# Altium PCB AnalogIO-CAN-HW-Rev1.PcbDoc (part 2 of 2)
Units mil, origin at the board's own origin, x right, y up, seen from the top; angles counter-clockwise.
Board outline 6000 x 4000 mil, 4 copper layers (Top Layer, Power Layer, Ground Layer, Bottom Layer), stack 22.156 mil thick; 185 components, 126 nets, 530 pads, 4 vias.
Unrouted connection lines stored in the file: 357.
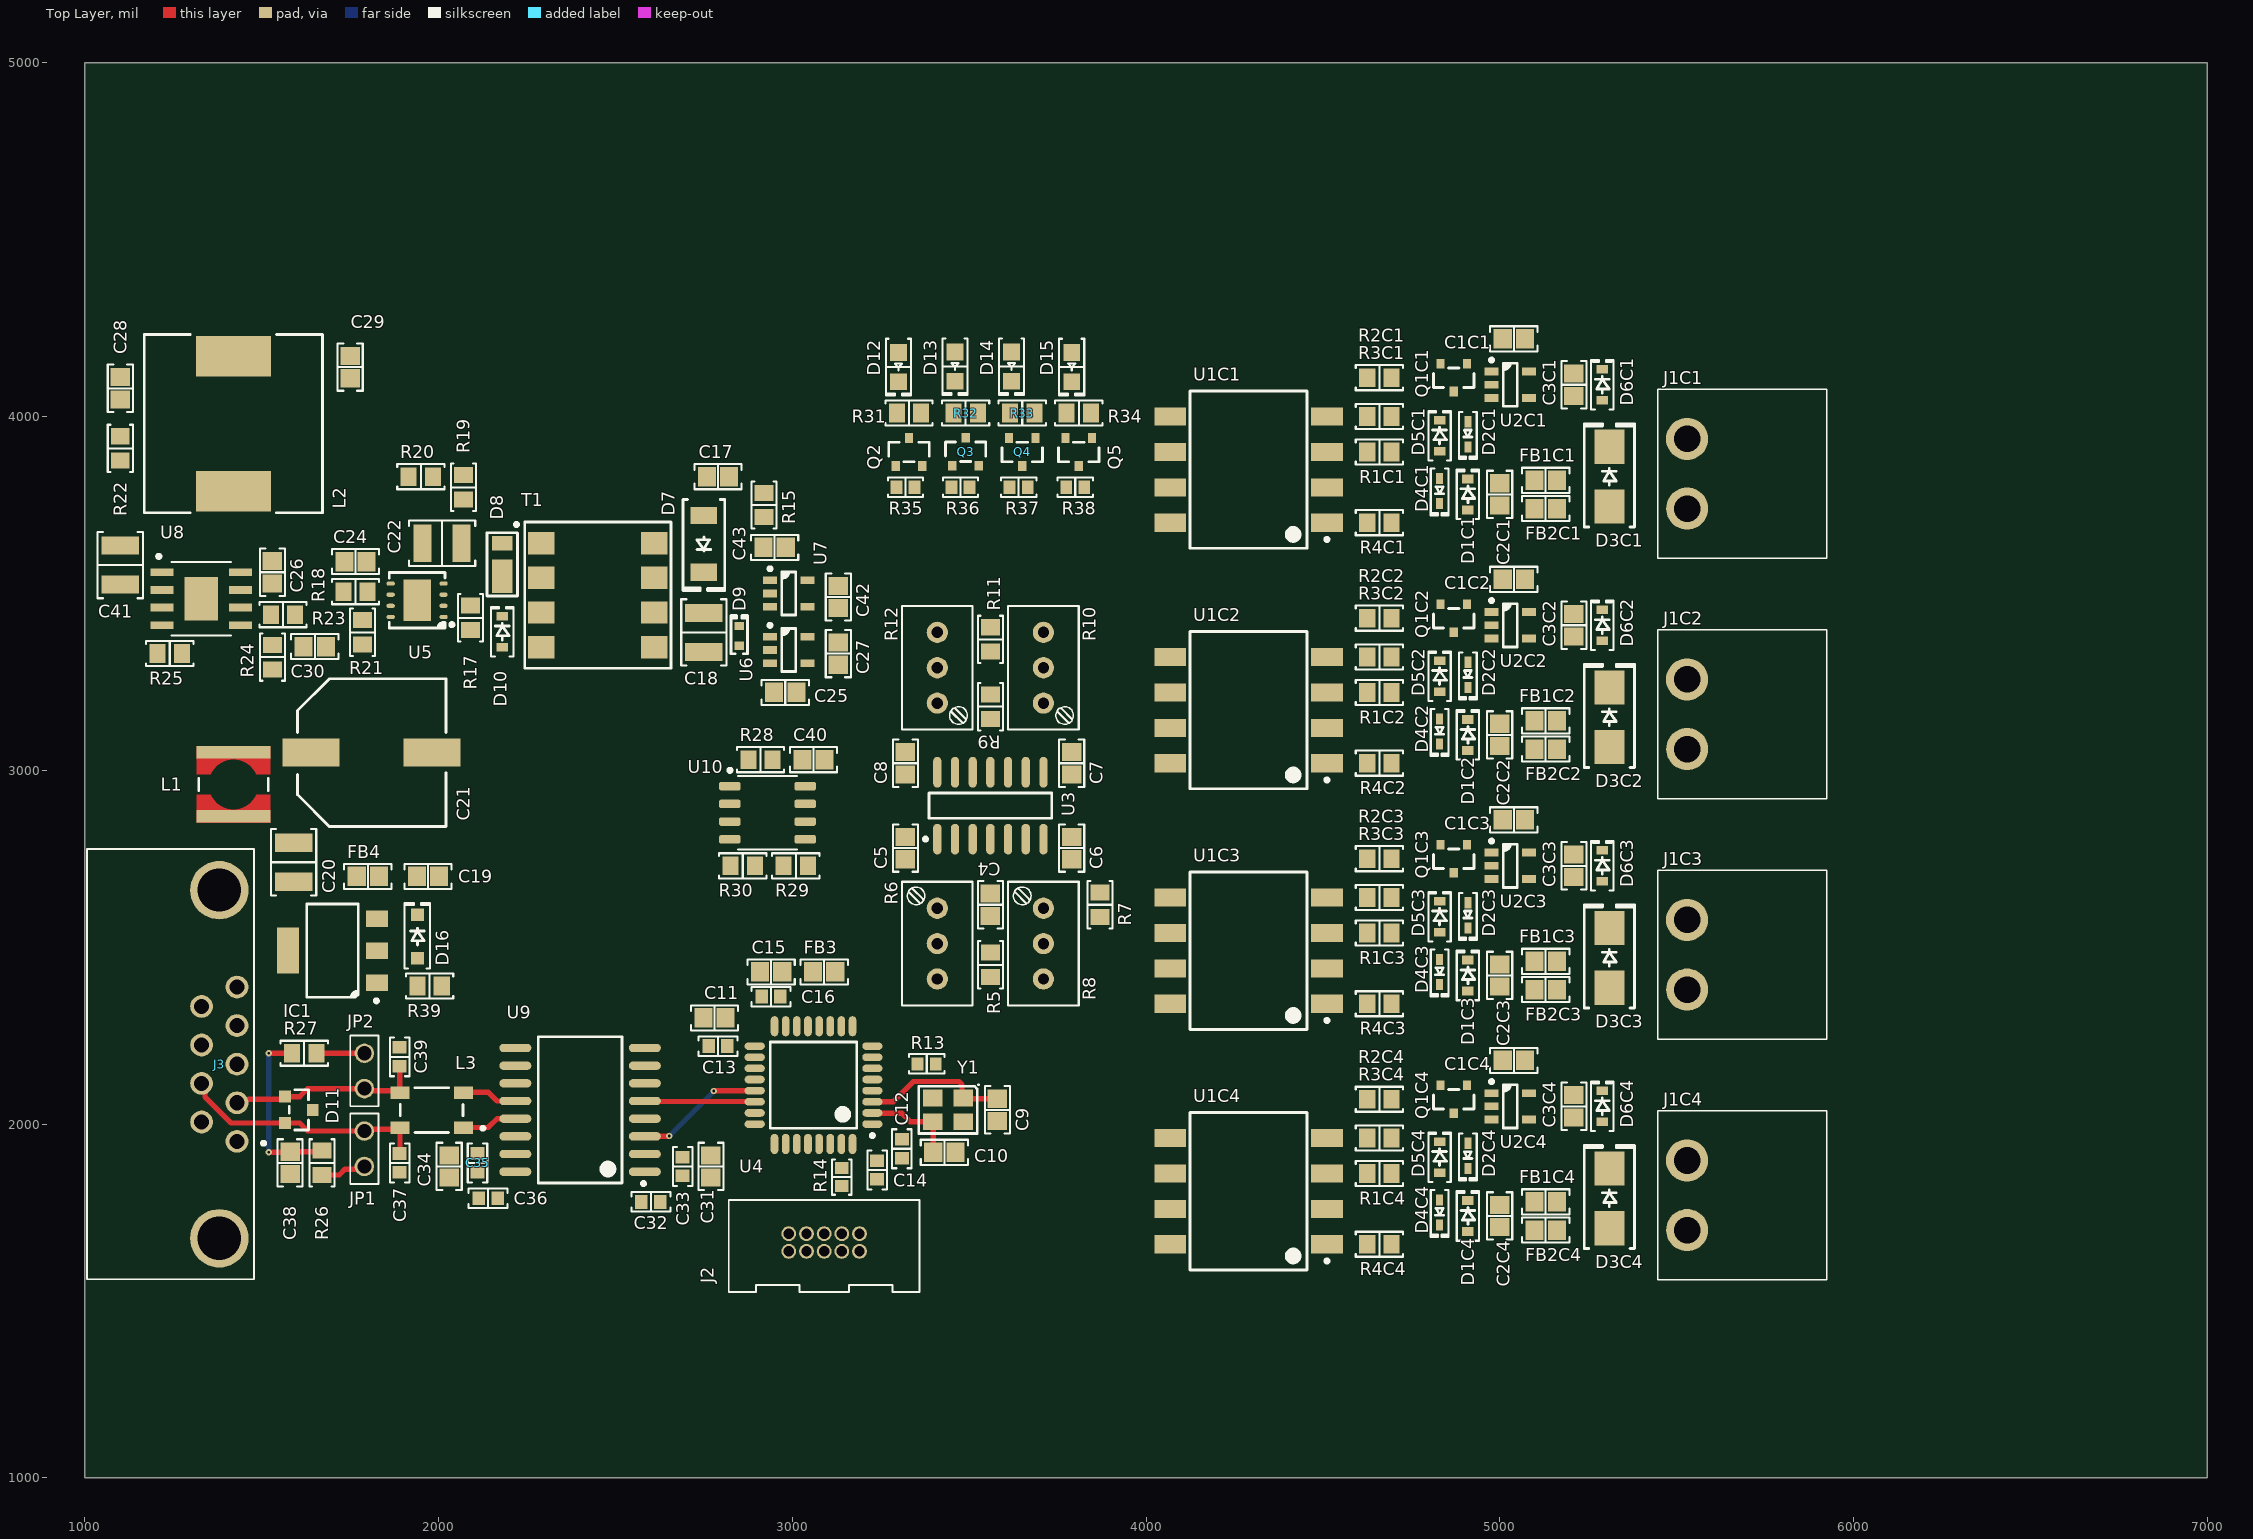
[diagram p0: Top Layer view]

## Part data (continued)
U4: "STM32G431 ARM Cortex-M4  170MHz MCU", Manufacturer=STMicroelectronics, Package=LQFP32, Voltage Supply="3.3 V", Connectivity="SPI, I2C, USART, USB, CAN, I2S", Core="ARM Cortex-M4", Core Size="32 bits", Created On="22/05/2020 19:49:45", Flash Size="128 kB", Part Number=STM32G431KBT6, Peripherals="ADC, DAC, Comparator, PGA, Temp, Timers", RAM Size="32 kB", Speed="170 MHz", Through Hole=0, Type=microcontroller, Updated On="22/05/2020 19:55:34"
U5: "65-V IN PSR Flyback DC/DC Converter with 100-V, 1.5-A Integrated Power MOSFET", Part Number=LM5180QNGURQ1
U6 U7: "TLV702 300-mA, Low-IQ, Low-Dropout Regulator", Part Number=TLV70233DBVR
U8: "100-V Input, 0.5-A Synchronous Buck DC/DC Converter with Ultra-low IQ", Manufacturer="Texas Instruments", Maximum Output Voltage="100 V", Minimum Input Voltage="6 V", Output Current="0.5 A", Package=PowerPAD-8, Switching Frequency="1 MHz", Created On="13/07/2020 20:55:36", Number of Outputs=1, Output Type=TBD, Part Number=LM5163DDAR, Through Hole=0, Topology=buck, Type=voltage_regulator_dcdc, Updated On="13/07/2020 20:57:00"
U9: "Isolated CAN FD Transceiver", Manufacturer="Texas Instruments", Package=SOIC-16, Supply Voltage="5 V", Created On="22/06/2020 19:10:03", Data Rate=5Mbps, Duplex=Full-Duplex, Part Number=ISO1042DWR, Protocol=CAN, Through Hole=0, Type=transceiver, Updated On="22/06/2020 19:54:36"
U10: "TMP1075 Temperature Sensor With I2C and SMBus Interface", Part Number=TMP1075DR
Y1: library part ABM8W-24.0000MHZ-8-B1U-T3, "24MHz 8pF -20C +70C 20ppm Crystal Oscillator", Frquency Tolerance="10 ppm", Load Capacitance="8 pF", Manufacturer=ABRACON, Package="4-SMD, No Lead", Created On="24/05/2020 8:58:56", Frequency="24 MHz", Part Number=ABM8W-24.0000MHZ-8-B1U-T3, Through Hole=0, Type=crystal_oscillator, Updated On="26/05/2020 19:01:38"

## Via types
v1: diameter 17.72, hole 7.87, Top Layer to Bottom Layer, 4 vias

## Nets (pads, with @x,y where several pads share a name; then routed paths per layer and width w, separated by ;. In a path a pad name is that pad's centre, name@x,y a point inside that pad or via, vN(x,y) a via of type N, cw(c..) or ccw(c..) an arc to the next point about the centre after c; other vN are vias at no path point)
AICHN1: C5.2 R6.2 R6.3 U3.1 U4.9
AICHN2: C6.2 R8.2 R8.3 U3.7 U4.10
AICHN3: C7.2 R10.2 R10.3 U3.8 U4.11 | length 10
  Top Layer w15: R10.2 R10.2@3720,3290
AICHN4: C8.2 R12.2 R12.3 U3.14 U4.12
AINC1_N: D3C1.2 FB2C1.2 J1C1.1
AINC1_P: D3C1.1 FB1C1.1 J1C1.2
AINC2_N: D3C2.2 FB2C2.2 J1C2.1
AINC2_P: D3C2.1 FB1C2.1 J1C2.2
AINC3_N: D3C3.2 FB2C3.2 J1C3.1
AINC3_P: D3C3.1 FB1C3.1 J1C3.2
AINC4_N: D3C4.2 FB2C4.2 J1C4.1
AINC4_P: D3C4.1 FB1C4.1 J1C4.2
AVDD: C15.2 C16.1 FB3.1 U4.15
BOOTSEL: J2.2 R14.1 U4.31 | length 1.8
  Top Layer w15: U4.31@3137.47,1942.39 U4.31
CANH: L3.1 U9.13 | length 157.3
  Top Layer w15: L3.1 2140,1990 2164.97,2014.97 U9.13
CANL: L3.2 U9.12 | length 148
  Top Layer w15: L3.2@2079.57,2089.21 2080.35,2090 2140,2090 2164.97,2065.03 U9.12
GND: C4.1 C9.2 C10.1 C11.1 C12.2 C13.2 C14.2 C15.1 C16.2 C18.2 C25.2 C27.2 C31.2 C32.1 C33.2 C40.2 C42.2 C43.2 D9.1 J2.5 J2.10 Q2.2 Q3.2 Q4.2 Q5.2 R14.2 T1.5 T1.6 U1C1.5 U1C2.5 U1C3.5 U1C4.5 U3.3 U3.5 U3.10 U3.11 U3.12 U4.14 U4.16 U4.32 U6.2 U7.2 U9.2 U9.8 U10.4 U10.5 U10.6 U10.7 Y1.2 Y1.4
GND_ISO: C19.2 C20.1 C21.2 C22.1 C24.1 C29.1 C34.2 C35.1 C36.2 C37.2 C38.1 C39.1 C41.1 D11.3 J3.3 J3.6 R20.1 R21.2 R24.2 R25.2 R39.1 U5.8 U5.9 U8.1 U8.9 U9.9 U9.10 U9.15
ISOIN: U1C1.6 U1C2.6 U1C3.6 U1C4.6
ISOIN1: C5.1 R5.2 U3.2
ISOIN2: C6.1 R7.2 U3.6
ISOIN3: C7.1 R9.2 U3.9
ISOIN4: C8.1 R11.2 U3.13
LEDIND1: R35.1 U4.5
LEDIND2: R36.1 U4.6
LEDIND3: R37.1 U4.7
LEDIND4: R38.1 U4.8
NetC1C1_1: C1C1.1 Q1C1.1 U2C1.1
NetC1C1_2: C1C1.2 R2C1.1 U2C1.4
NetC1C2_1: C1C2.1 Q1C2.1 U2C2.1
NetC1C2_2: C1C2.2 R2C2.1 U2C2.4
NetC1C3_1: C1C3.1 Q1C3.1 U2C3.1
NetC1C3_2: C1C3.2 R2C3.1 U2C3.4
NetC1C4_1: C1C4.1 Q1C4.1 U2C4.1
NetC1C4_2: C1C4.2 R2C4.1 U2C4.4
NetC2C1_1: C2C1.1 D2C1.1 D5C1.2 FB2C1.1
NetC2C1_2: C2C1.2 D1C1.1 D4C1.2 FB1C1.2
NetC2C2_1: C2C2.1 D2C2.1 D5C2.2 FB2C2.1
NetC2C2_2: C2C2.2 D1C2.1 D4C2.2 FB1C2.2
NetC2C3_1: C2C3.1 D2C3.1 D5C3.2 FB2C3.1
NetC2C3_2: C2C3.2 D1C3.1 D4C3.2 FB1C3.2
NetC2C4_1: C2C4.1 D2C4.1 D5C4.2 FB2C4.1
NetC2C4_2: C2C4.2 D1C4.1 D4C4.2 FB1C4.2
NetC3C1_1: C3C1.1 D6C1.1 Q1C1.3 R1C1.2 R2C1.2 U1C1.3 U2C1.2
NetC3C1_2: C3C1.2 D1C1.2 D2C1.2 D6C1.2 U1C1.2 U2C1.5
NetC3C2_1: C3C2.1 D6C2.1 Q1C2.3 R1C2.2 R2C2.2 U1C2.3 U2C2.2
NetC3C2_2: C3C2.2 D1C2.2 D2C2.2 D6C2.2 U1C2.2 U2C2.5
NetC3C3_1: C3C3.1 D6C3.1 Q1C3.3 R1C3.2 R2C3.2 U1C3.3 U2C3.2
NetC3C3_2: C3C3.2 D1C3.2 D2C3.2 D6C3.2 U1C3.2 U2C3.5
NetC3C4_1: C3C4.1 D6C4.1 Q1C4.3 R1C4.2 R2C4.2 U1C4.3 U2C4.2
NetC3C4_2: C3C4.2 D1C4.2 D2C4.2 D6C4.2 U1C4.2 U2C4.5
NetC17_1: C17.1 D7.1 T1.7 T1.8
NetC17_2: C17.2 R15.2
NetC19_1: C19.1 D16.2 FB4.2 IC1.3
NetC20_2: C20.2 FB4.1 L1.2
NetC23_1: C23.1 R16.1
NetC23_2: C23.2 D10.1 R17.1 T1.4 U5.1
NetC24_2: C24.2 U5.5
NetC26_1: C26.1 L2.1 R22.2 U8.8
NetC26_2: C26.2 U8.7
NetC28_2: C28.2 C30.2 R22.1
NetC30_1: C30.1 R23.2 R24.1 U8.5
NetC37_1: C37.1 D11.2 J3.7 JP1.1 L3.4 | length 704.9
  Top Layer w15: J3.7 1339.45,2105.28 1339.45,2076.55 1413.4,2002.6 D11.2 1607.4,2002.6 1630,1980 JP1.1 ; JP1.1@1785.39,1985.39 JP1.1@1785.79,1985 ; JP1.1@1795,1985 1885.87,1985 1890,1989.13 L3.4 1890.87,1917.44 C37.1
NetC38_2: C38.2 R26.1 R27.1 | length 497.4
  Top Layer w15: v1(1520,1920) 1578.5,1920 C38.2 1667.05,1921.5 R26.1 ; v1(1520,2200) R27.1
  Bottom Layer w15: v1(1520,1920) v1(1520,2200)
NetC39_2: C39.2 D11.1 J3.2 JP2.1 L3.3 | length 574
  Top Layer w15: J3.2 1439.45,2069.45 1462.92,2069.45 1463.47,2070 1558.23,2070 D11.1 1607.4,2077.4 1630,2100 JP2.1@1780,2100 ; JP2.1@1795.39,2094.61 JP2.1 JP2.1@1780,2100 ; C39.2 L3.3@1890,2089.29 ; L3.3 L3.3@1890,2089.29 ; JP2.1@1780,2100 1785.79,2094.21 1885.08,2094.21 L3.3@1890,2089.29
NetD4C1_1: D4C1.1 D5C1.1 R1C1.1 R3C1.1
NetD4C2_1: D4C2.1 D5C2.1 R1C2.1 R3C2.1
NetD4C3_1: D4C3.1 D5C3.1 R1C3.1 R3C3.1
NetD4C4_1: D4C4.1 D5C4.1 R1C4.1 R3C4.1
NetD8_2: D8.2 D10.2
NetD12_2: D12.2 R31.1
NetD13_2: D13.2 R32.1
NetD14_2: D14.2 R33.1
NetD15_2: D15.2 R34.1
NetD16_1: D16.1 IC1.1 R39.2
NetJP1_2: JP1.2 R26.2 | length 130.1
  Top Layer w15: R26.2 1719.07,1855.55 1735.87,1872.35 1782.35,1872.35 JP1.2
NetJP2_2: JP2.2 R27.2 | length 135.6
  Top Layer w15: R27.2 JP2.2
NetQ1C1_2: Q1C1.2 R4C1.2
NetQ1C2_2: Q1C2.2 R4C2.2
NetQ1C3_2: Q1C3.2 R4C3.2
NetQ1C4_2: Q1C4.2 R4C4.2
NetQ2_1: Q2.1 R35.2
NetQ2_3: Q2.3 R31.2
NetQ3_1: Q3.1 R36.2
NetQ3_3: Q3.3 R32.2
NetQ4_1: Q4.1 R37.2
NetQ4_3: Q4.3 R33.2
NetQ5_1: Q5.1 R38.2
NetQ5_3: Q5.3 R34.2
NetR3C1_2: R3C1.2 U1C1.4 U2C1.3
NetR3C2_2: R3C2.2 U1C2.4 U2C2.3
NetR3C3_2: R3C3.2 U1C3.4 U2C3.3
NetR3C4_2: R3C4.2 U1C4.4 U2C4.3
NetR4C1_1: R4C1.1 U1C1.1
NetR4C2_1: R4C2.1 U1C2.1
NetR4C3_1: R4C3.1 U1C3.1
NetR4C4_1: R4C4.1 U1C4.1
NetR5_1: R5.1 R6.1
NetR7_1: R7.1 R8.1
NetR9_1: R9.1 R10.1
NetR11_1: R11.1 R12.1
NetR17_2: R17.2 U5.2
NetR18_1: R18.1 U5.6
NetR18_2: R18.2 R21.1 U5.7
NetR19_2: R19.2 R20.2 U5.4
NetR25_1: R25.1 U8.4
NetR28_1: R28.1 U4.28 U10.1
NetR29_1: R29.1 U4.18 U10.2
NetR30_2: R30.2 U4.29 U10.3
NetU4_21: U4.21 U9.3 | length 364.7
  Top Layer w15: U9.3 2650.26,1965 2651.26,1966 v1(2652,1966) ; v1(2778,2093) 2779.13,2094.13 2893.54,2094.13 U4.21
  Bottom Layer w15: v1(2652,1966) 2778,2092 v1(2778,2093)
NetU4_22: U4.22 U9.5 | length 311.5
  Top Layer w15: U9.5 2584.19,2063.88 2892.54,2063.88 U4.22
NRST: J2.3 R13.2 U4.4
OSC_N: C10.2 U4.2 Y1.3 | length 267.9
  Top Layer w15: U4.2 3227.6,2030 3310,2030 3333.46,2006.54 Y1.3 3398.5,2004.72 C10.2
OSC_P: C9.1 U4.3 Y1.1 | length 417.6
  Top Layer w15: U4.3 3285.09,2062.76 3342.34,2120 3471.21,2120 3480,2111.21 3480,2076.77 Y1.1 3485.28,2071.5 C9.1
SWCLK: J2.4 U4.24
SWDIO: J2.6 U4.23
SWO: J2.8 U4.26
UARTRX: J2.7 U4.20
UARTTX: J2.9 U4.19
V_5V5_ISO: C34.1 C35.2 C36.1
VCC_4V: C18.1 C25.1 C43.1 D7.2 D9.2 R15.1 U6.1 U6.3 U7.1 U7.3
VCCA_3V3: C4.2 C27.1 FB3.2 U3.4 U6.5
VCCD_3V3: C11.2 C12.1 C13.1 C14.1 C31.1 C32.2 C33.1 C40.1 C42.1 D12.1 D13.1 D14.1 D15.1 J2.1 R13.1 R28.2 R29.2 R30.1 U4.1 U4.17 U7.5 U9.1 U10.8
VCCNISO_5V: C28.1 C29.2 L2.2 R23.1 U9.11 U9.16
VIN_24: IC1.2 IC1.4 J3.4
VIN_24_FILTERED: C21.1 C22.2 C41.2 D8.1 L1.1 R16.2 R19.1 T1.1 U5.3 U8.2 U8.3
pads on no net: J3.1 J3.5 J3.8 J3.9 J3.S1 J3.S2 T1.2 T1.3 U1C1.7 U1C1.8 U1C2.7 U1C2.8 U1C3.7 U1C3.8 U1C4.7 U1C4.8 U4.13 U4.25 U4.27 U4.30 U6.4 U7.4 U8.6 U9.4 U9.6 U9.7 U9.14

## Text inside footprints (layer, text, board x,y; h text height)
U8: Mechanical 13 "*" at 1252.75,3530.5 h50